# Altium PCB E_Tactile_Display.PcbDoc
Units mm, origin at the board's own origin, x right, y up, seen from the top; angles counter-clockwise.
Board outline 38.64 x 258.08 mm, 2 copper layers (Top Layer, Bottom Layer), stack 0.321 mm thick; 3 components, 32 nets, 64 pads, 16 vias.
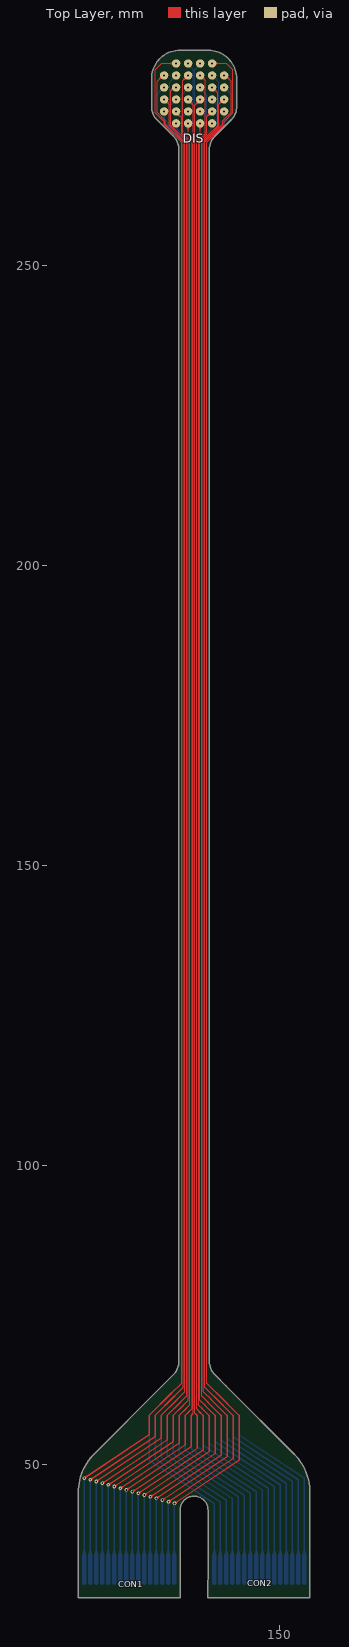
[diagram p0: Top Layer view]
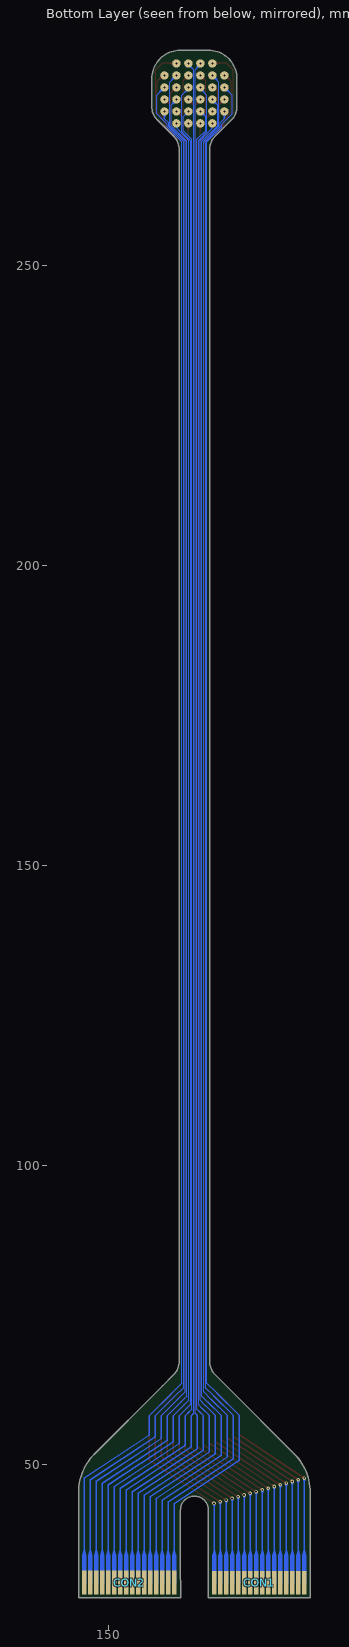
[diagram p1: Bottom Layer view, seen from below]

## Layer stack, top to bottom
Top Stiffener: core 0.1, Core-009, Dk 4.5
Top PI Coverlay: solder mask 0.05, FC-001, Dk 4
Top Layer: signal copper 0.035
Adhesive 1: prepreg 0.013, PP-006, Dk 4.1
Polymide: core 0.025, Core-009, Dk 4.5
Adhesive 2: prepreg 0.013, PP-006, Dk 4.1
Bottom Layer: signal copper 0.035
Bottom PI Coverlay: solder mask 0.05, FC-001, Dk 4
Bottom Stiffener: core 0.1, Core-009, Dk 4.5

## Board outline
116.375,27.85 133.375,27.85 133.375,33.85 133.375,42.486 cw(c135.675,42.486) 135.675,44.786 135.717,44.786 cw(c135.717,42.486) 138.017,42.486 138.017,33.85 137.975,27.85 155.017,27.85 155.017,33.85 155.017,45.386 ccw(c145.838,45.386) 152.328,51.876 141.036,63.169 139.145,65.06 cw(c141.313,67.228) 138.247,67.228 138.247,269.409 cw(c141.313,269.409) 139.145,271.577 141.898,274.33 ccw(c139.73,276.498) 142.796,276.498 142.796,281.194 ccw(c138.062,281.194) 138.062,285.928 133.33,285.928 ccw(c133.33,281.194) 128.596,281.194 128.596,276.498 ccw(c131.662,276.498) 129.494,274.33 132.247,271.577 cw(c130.079,269.409) 133.145,269.409 133.145,67.228 cw(c130.079,67.228) 132.247,65.06 130.356,63.169 119.063,51.876 ccw(c125.554,45.386) 116.375,45.386 116.375,33.85 116.375,29.25
board region "Layer Stack Region 7": 116.375,45.386 116.375,45.837 116.463,46.734 116.639,47.619 116.901,48.482 117.246,49.315 117.671,50.11 118.172,50.86 118.745,51.557 119.063,51.876 130.356,63.169 132.247,65.06 132.351,65.169 132.542,65.401 132.709,65.651 132.851,65.917 132.966,66.195 133.053,66.483 133.112,66.778 133.141,67.077 133.145,67.228 133.145,269.409 133.141,269.559 133.112,269.858 133.053,270.154 132.966,270.441 132.851,270.719 132.709,270.985 132.542,271.235 132.351,271.468 132.247,271.577 129.494,274.33 129.387,274.436 129.196,274.669 129.029,274.919 128.887,275.185 128.772,275.463 128.684,275.752 128.625,276.047 128.596,276.347 128.596,276.498 128.596,281.194 128.596,281.504 128.677,282.119 128.838,282.719 129.075,283.292 129.385,283.829 129.763,284.322 130.202,284.761 130.694,285.138 131.232,285.449 131.805,285.686 132.404,285.847 133.02,285.928 133.33,285.928 138.062,285.928 138.372,285.928 138.988,285.847 139.587,285.686 140.16,285.449 140.698,285.138 141.19,284.761 141.629,284.322 142.007,283.829 142.317,283.292 142.554,282.719 142.715,282.119 142.796,281.504 142.796,281.194 142.796,276.498 142.796,276.347 142.766,276.047 142.708,275.752 142.62,275.464 142.505,275.185 142.363,274.92 142.196,274.669 142.004,274.436 141.898,274.33 139.145,271.577 139.041,271.468 138.85,271.235 138.683,270.985 138.541,270.719 138.426,270.441 138.339,270.154 138.28,269.858 138.25,269.559 138.247,269.409 138.247,67.228 138.25,67.077 138.28,66.778 138.339,66.483 138.426,66.195 138.541,65.917 138.683,65.651 138.85,65.401 139.041,65.169 139.145,65.06 141.036,63.169 152.328,51.876 152.647,51.557 153.219,50.86 153.72,50.11 154.146,49.315 154.491,48.482 154.752,47.619 154.928,46.734 155.017,45.837 155.017,45.386 155.017,33.85 138.017,33.85 138.017,42.486 138.006,42.712 137.918,43.154 137.745,43.57 137.495,43.945 137.176,44.264 136.801,44.515 136.384,44.687 135.942,44.775 135.717,44.786 135.675,44.786 135.45,44.775 135.007,44.687 134.591,44.515 134.216,44.264 133.897,43.945 133.647,43.57 133.474,43.154 133.386,42.712 133.375,42.486 133.375,33.85 116.375,33.85
board region "Layer Stack Region 8": 137.975,27.85 155.017,27.85 155.017,33.85 138.017,33.85
board region "Layer Stack Region 1": 116.375,27.85 133.375,27.85 133.375,33.85 116.375,33.85 116.375,29.25

## Design rules (kind name [scope] priority, off if disabled: settings)
BoardOutlineClearance [All] p1: gap=0.2 ignorepadtopadclearanceinfootprint=FALSE except(0: Track-SplitContinuation)
Clearance [All] p1: gap=0.127 ignorepadtopadclearanceinfootprint=FALSE except(0.1: Arc-Arc Arc-Track Arc-SMDPad Arc-THPad Arc-Via Arc-Fill Arc-Poly Arc-Region Arc-Text Track-Track Track-SMDPad Track-THPad Track-Via Track-Fill Track-Poly Track-Region Track-Text; 0.25: Arc-Hole Track-Hole SMDPad-Hole THPad-Hole Via-Hole Fill-Hole Poly-Hole Region-Hole Text-Hole)
ComponentClearance [All] p1: gap=0.127 collisioncheckmode=3 verticalgap=0.127 showdistances=TRUE
DiffPairsRouting [All] p1: maxlimit=0.254 minlimit=0.127 mostfreqgap=0.127 substack1={EE5E7AEB-4C77-4B40-8D6A-D96C21E7CAA2} toplayer_{ee5e7aeb-4c77-4b40-8d6a-d96c21e7caa2}_minwidth=0.381 toplayer_{ee5e7aeb-4c77-4b40-8d6a-d96c21e7caa2}_maxwidth=0.381 toplayer_{ee5e7aeb-4c77-4b40-8d6a-d96c21e7caa2}_prefwidth=0.381 bottomlayer_{ee5e7aeb-4c77-4b40-8d6a-d96c21e7caa2}_minwidth=0.381 bottomlayer_{ee5e7aeb-4c77-4b40-8d6a-d96c21e7caa2}_maxwidth=0.381 bottomlayer_{ee5e7aeb-4c77-4b40-8d6a-d96c21e7caa2}_prefwidth=0.381 toplayer_minwidth=0.127 toplayer_maxwidth=25.4 toplayer_prefwidth=0.127 bottomlayer_minwidth=0.127 bottomlayer_maxwidth=25.4 bottomlayer_prefwidth=0.127 substack2={FC3574B1-0B62-4439-9CDF-B77EBD2AA575} toplayer_{fc3574b1-0b62-4439-9cdf-b77ebd2aa575}_minwidth=0.381 toplayer_{fc3574b1-0b62-4439-9cdf-b77ebd2aa575}_maxwidth=0.381 toplayer_{fc3574b1-0b62-4439-9cdf-b77ebd2aa575}_prefwidth=0.381 bottomlayer_{fc3574b1-0b62-4439-9cdf-b77ebd2aa575}_minwidth=0.381 bottomlayer_{fc3574b1-0b62-4439-9cdf-b77ebd2aa575}_maxwidth=0.381 bottomlayer_{fc3574b1-0b62-4439-9cdf-b77ebd2aa575}_prefwidth=0.381 substack3={35F34E09-632A-4CE6-B0EC-4E9E578C186C} toplayer_{35f34e09-632a-4ce6-b0ec-4e9e578c186c}_minwidth=0.381 toplayer_{35f34e09-632a-4ce6-b0ec-4e9e578c186c}_maxwidth=0.381 toplayer_{35f34e09-632a-4ce6-b0ec-4e9e578c186c}_prefwidth=0.381 bottomlayer_{35f34e09-632a-4ce6-b0ec-4e9e578c186c}_minwidth=0.381 bottomlayer_{35f34e09-632a-4ce6-b0ec-4e9e578c186c}_maxwidth=0.381 bottomlayer_{35f34e09-632a-4ce6-b0ec-4e9e578c186c}_prefwidth=0.381 maxuncoupledlength=12.7
Height [All] p1: minheight=0 maxheight=1816.048 prefheight=12.7
HoleSize [All] p1: absolutevalues=TRUE maxlimit=6.3 minlimit=0.3 maxpercent=80.000 minpercent=20.000
HoleToHoleClearance [All] p1: gap=0.25 allowstackedmicrovias=FALSE
MinimumAnnularRing [All] p1: minimumring=0.076
MinimumSolderMaskSliver [All] p1: minsoldermaskwidth=0
PlaneClearance [All] p1: clearance=0.127
PlaneConnect PlaneConnectPowerPads [InPadClass('PowerPads')] p1: planeconnectstyle=Direct reliefexpansion=0.508 reliefentries=4 reliefconductorwidth=0.254 reliefairgap=0.254
PlaneConnect [All] p2: pad.planeconnectstyle=Relief pad.reliefexpansion=0.3 pad.reliefentries=4 pad.reliefconductorwidth=0.127 pad.reliefairgap=0.127 via.planeconnectstyle=Direct via.reliefexpansion=0.3 via.reliefentries=4 via.reliefconductorwidth=0.127 via.reliefairgap=0.127
PolygonConnect PolygonConnectPowerPads [All vs (InPadClass('PowerPads'))] p1: connectstyle=Direct reliefconductorwidth=0.254 reliefentries=4 polygonreliefangle="90 Angle" airgapwidth=0.254
PolygonConnect [All] p2: thpad.connectstyle=Relief thpad.reliefconductorwidth=0.127 thpad.reliefentries=4 thpad.polygonreliefangle="90 Angle" thpad.airgapwidth=0.127 smdpad.connectstyle=Relief smdpad.reliefconductorwidth=0.127 smdpad.reliefentries=4 smdpad.polygonreliefangle="90 Angle" smdpad.airgapwidth=0.127 via.connectstyle=Direct via.reliefconductorwidth=0.127 via.reliefentries=4 via.polygonreliefangle="90 Angle" via.airgapwidth=0.127
RoutingVias [All] p1: holewidth=0.3 width=0.6 viastyle="Through Hole" minholewidth=0.3 minwidth=0.6 maxholewidth=0.6 maxwidth=6.6
SilkToSilkClearance [All] p1: silktosilkclearance=0
SilkToSolderMaskClearance [IsPad] p1: minsilkscreentomaskgap=0.127 clearancetoexposedcopper=TRUE
SolderMaskExpansion [All] p1: expansion=0.075 istentingtop=FALSE
Width [All] p1: maxlimit=25.4 minlimit=0.025 preferedwidth=0.127 substack1={EE5E7AEB-4C77-4B40-8D6A-D96C21E7CAA2} toplayer_{ee5e7aeb-4c77-4b40-8d6a-d96c21e7caa2}_minwidth=0.127 bottomlayer_{ee5e7aeb-4c77-4b40-8d6a-d96c21e7caa2}_minwidth=0.127 substack2={FC3574B1-0B62-4439-9CDF-B77EBD2AA575} toplayer_{fc3574b1-0b62-4439-9cdf-b77ebd2aa575}_minwidth=0.127 bottomlayer_{fc3574b1-0b62-4439-9cdf-b77ebd2aa575}_minwidth=0.127 substack3={35F34E09-632A-4CE6-B0EC-4E9E578C186C} toplayer_{35f34e09-632a-4ce6-b0ec-4e9e578c186c}_minwidth=0.127 bottomlayer_{35f34e09-632a-4ce6-b0ec-4e9e578c186c}_minwidth=0.127 minimp=50.000000 maximp=50.000000 favimp=50.000000
20 further rules are at their usual default settings.

## Classes and differential pairs
component class E_Tactile_Display: CON1 CON2

## Components (designator, comment, footprint, x,y, rotation, side; value= is the part's Value field where it differs from the comment)
CON1 "FFC_CON_16" 16_pin_smd_connector_pads 132.375,30.35 r90 top
CON2 "FFC_CON_16" 16_pin_smd_connector_pads 154.066,30.362 r90 top
DIS "Etactile_display" Electrode_Display 135.696,278.728 r0 top

## Footprints (in the part's own frame and the unit in brackets; to place one, negate y for a bottom-side part, rotate by r counter-clockwise, add the part's x,y. Pads: shape width x height; smd on the part's side, far side on the other; paste and mask are expansions set on the pad)
16_pin_smd_connector_pads [mm]
  rect 4x0.7 smd far side mask+0: 1(0,15) 2(0,14) 3(0,13) 4(0,12) 5(0,11) 6(0,10) 7(0,9) 8(0,8) 9(0,7) 10(0,6) 11(0,5) 12(0,4) 13(0,3) 14(0,2) 15(0,1) 16(0,0)
Electrode_Display [mm]
  round 1.4 hole 0.3: 0(-3,5) 1(-5,3) 2(-5,-1) 3(-3,1) 4(-3,-3) 5(-1,3) 6(-1,-5) 7(-1,-1) 8(1,-1) 9(1,-5) 10(1,3) 11(3,-3) 12(3,1) 13(5,-1) 14(5,3) 15(3,5) 16(-5,1) 17(-5,-3) 18(-3,3) 19(-3,-1) 20(-3,-5) 21(-1,1) 22(-1,-3) 23(-1,5) 24(1,5) 25(1,-3) 26(1,1) 27(3,-5) 28(3,-1) 29(3,3) 30(5,-3) 31(5,1)

## Via types
v1: diameter 0.6, hole 0.3, Top Layer to Bottom Layer, tented both sides, 16 vias

## Nets (pads, with @x,y where several pads share a name; then routed paths per layer and width w, separated by ;. In a path a pad name is that pad's centre, name@x,y a point inside that pad or via, vN(x,y) a via of type N, cw(c..) or ccw(c..) an arc to the next point about the centre after c; other vN are vias at no path point)
NetCON1_1: CON1.1 DIS.0 | length 266
  Top Layer w0.127: 131.9,61.957 133.6,63.657 133.6,270.625 130.696,273.529 130.696,274.028 129.253,275.47 129.253,282.685 130.296,283.728 DIS.0
  Top Layer w0.254: v1(117.375,47.807) 128.196,55.007 128.196,58.253 131.9,61.957
  Bottom Layer w0.254: 117.375,34.883 v1(117.375,47.807)
  Bottom Layer w0.7: CON1.1 117.375,34.883
NetCON1_2: CON1.2 DIS.1 | length 261.5
  Top Layer w0.127: DIS.1 130.496,281.728 129.519,280.751 129.519,275.604 130.923,274.201 130.923,273.623 133.88,270.666 133.88,62.937 132.393,61.45
  Top Layer w0.254: v1(118.378,47.525) 129.196,54.725 129.196,58.253 132.393,61.45
  Bottom Layer w0.254: 118.375,34.883 v1@118.375,47.522
  Bottom Layer w0.7: CON1.2 118.375,34.883
NetCON1_3: CON1.3 DIS.2 | length 256.2
  Top Layer w0.127: DIS.2 131.559,276.864 131.559,273.308 134.159,270.708 134.159,62.216 132.868,60.925
  Top Layer w0.254: v1(119.381,47.243) 130.196,54.443 130.196,58.253 132.868,60.925
  Bottom Layer w0.254: 119.375,34.883 v1@119.375,47.237
  Bottom Layer w0.7: CON1.3 119.375,34.883
NetCON1_4: CON1.4 DIS.3 | length 258.2
  Top Layer w0.127: DIS.3 132.396,279.728 131.786,279.118 131.786,273.402 134.438,270.75 134.438,61.495 133.368,60.425
  Top Layer w0.254: v1(120.384,46.961) 131.197,54.16 ; 131.196,54.161 131.196,58.253 133.368,60.425
  Bottom Layer w0.254: 120.375,34.883 v1@120.375,46.952
  Bottom Layer w0.7: CON1.4 120.375,34.883
NetCON1_5: CON1.5 DIS.4 | length 253
  Top Layer w0.127: DIS.4 132.696,275.531 133.596,274.631 133.596,271.913 134.718,270.791 134.718,60.775 133.868,59.925
  Top Layer w0.254: v1(121.387,46.679) 132.083,53.804 132.196,53.917 132.196,58.253 133.868,59.925
  Bottom Layer w0.254: 121.375,34.883 v1@121.375,46.667
  Bottom Layer w0.7: CON1.5 121.375,34.883
NetCON1_6: CON1.6 DIS.5 | length 258.7
  Top Layer w0.127: 134.375,59.432 134.997,60.054 134.997,270.833 133.824,272.006 133.824,280.856 DIS.5
  Top Layer w0.254: v1(122.39,46.397) 133.196,53.597 133.196,58.253 134.375,59.432
  Bottom Layer w0.254: 122.375,34.883 v1@122.375,46.382
  Bottom Layer w0.7: CON1.6 122.375,34.883
NetCON1_7: CON1.7 DIS.6 | length 249.9
  Top Layer w0.127: DIS.6 134.696,271.628 135.277,271.047 135.277,59.334 134.825,58.882
  Top Layer w0.254: v1(123.393,46.115) 134.196,53.315 134.196,58.253 134.825,58.882
  Bottom Layer w0.254: 123.375,34.883 123.375,46.097 v1(123.393,46.115)
  Bottom Layer w0.7: CON1.7 123.375,34.883
NetCON1_8: CON1.8 DIS.7 | length 253.7
  Top Layer w0.127: DIS.7 134.696,277.628 135.559,276.764 135.559,272.121 135.556,272.117 135.556,58.613 135.343,58.4
  Top Layer w0.254: v1(124.396,45.833) 135.196,53.033 135.196,58.253 135.343,58.4
  Bottom Layer w0.254: 124.375,34.883 124.375,45.812 v1(124.396,45.833)
  Bottom Layer w0.7: CON1.8 124.375,34.883
NetCON1_9: CON1.9 DIS.8 | length 253.7
  Top Layer w0.127: 136.048,58.4 135.836,58.613 135.835,272.117 135.832,272.121 135.832,276.764 136.696,277.628 DIS.8
  Top Layer w0.254: v1(125.399,45.551) 136.196,52.751 136.196,58.253 136.048,58.4
  Bottom Layer w0.254: 125.375,34.883 125.375,45.527 v1(125.399,45.551)
  Bottom Layer w0.7: CON1.9 125.375,34.883
NetCON1_10: CON1.10 DIS.9 | length 249.9
  Top Layer w0.127: 136.567,58.882 136.115,59.333 136.115,271.047 136.696,271.628 DIS.9
  Top Layer w0.254: v1(126.402,45.269) 137.196,52.469 137.196,58.253 136.567,58.882
  Bottom Layer w0.254: 126.375,34.883 126.375,45.242 v1(126.402,45.269)
  Bottom Layer w0.7: CON1.10 126.375,34.883
NetCON1_11: CON1.11 DIS.10 | length 258.8
  Top Layer w0.127: DIS.10 137.482,280.942 ; 137.017,59.432 136.396,60.053 136.396,60.153 136.396,270.805 137.568,271.977 137.568,280.856 137.482,280.942
  Top Layer w0.254: v1(127.406,44.987) 138.196,52.187 138.196,58.253 137.017,59.432
  Bottom Layer w0.254: 127.375,34.883 127.375,44.957 v1(127.406,44.987)
  Bottom Layer w0.7: CON1.11 127.375,34.883
NetCON1_12: CON1.12 DIS.11 | length 253
  Top Layer w0.127: 137.523,59.925 136.674,60.775 136.674,270.762 137.796,271.884 137.796,274.828 DIS.11
  Top Layer w0.254: v1(128.409,44.705) 139.196,51.905 139.196,58.253 137.523,59.925
  Bottom Layer w0.254: 128.375,34.883 128.375,44.672 v1(128.409,44.705)
  Bottom Layer w0.7: CON1.12 128.375,34.883
NetCON1_13: CON1.13 DIS.12 | length 258
  Top Layer w0.127: 138.023,60.425 136.953,61.495 136.953,270.721 138.194,271.962 138.194,271.967 139.605,273.378 139.605,278.828 139.596,278.828 DIS.12
  Top Layer w0.254: v1(129.412,44.423) 140.196,51.624 140.196,58.253 138.023,60.425
  Bottom Layer w0.254: 129.375,34.883 129.375,44.387 v1(129.412,44.423)
  Bottom Layer w0.7: CON1.13 129.375,34.883
NetCON1_14: CON1.14 DIS.13 | length 256.3
  Top Layer w0.127: 138.523,60.925 137.233,62.216 137.232,270.679 138.427,271.874 139.832,273.279 139.832,276.946 140.614,277.728 DIS.13
  Top Layer w0.254: v1(130.415,44.142) 141.196,51.342 141.196,58.253 138.523,60.925
  Bottom Layer w0.254: 130.375,34.883 130.375,44.102 v1(130.415,44.142)
  Bottom Layer w0.7: CON1.14 130.375,34.883
NetCON1_15: CON1.15 DIS.14 | length 261.5
  Top Layer w0.127: 138.998,61.45 137.512,62.937 137.512,270.637 138.654,271.78 140.469,273.594 140.469,274.201 141.872,275.604 141.872,280.751 140.896,281.728 DIS.14
  Top Layer w0.254: v1(131.418,43.86) 142.196,51.06 142.196,58.253 138.998,61.45
  Bottom Layer w0.254: 131.375,34.84 131.375,43.817 v1(131.418,43.86)
  Bottom Layer w0.7: CON1.15 131.375,34.84
NetCON1_16: CON1.16 DIS.15 | length 266
  Top Layer w0.127: DIS.15 141.096,283.728 142.138,282.685 142.138,275.47 140.696,274.028 140.696,273.5 138.881,271.686 137.791,270.596 137.791,63.657 139.492,61.957
  Top Layer w0.254: v1(132.421,43.578) 143.196,50.778 143.196,58.253 139.492,61.957
  Bottom Layer w0.254: 132.375,34.883 132.375,43.532 v1(132.421,43.578)
  Bottom Layer w0.7: CON1.16 132.375,34.883
NetCON2_1: CON2.1 DIS.16 | length 259.7
  Bottom Layer w0.127: DIS.16 129.396,278.428 129.396,275.328 131.151,273.572 131.151,273.088 133.6,270.639 133.6,63.632 131.9,61.932
  Bottom Layer w0.254: 131.9,61.932 128.196,58.228 128.196,50.753 139.066,43.544 139.066,34.895
  Bottom Layer w0.7: CON2.1 139.066,34.895
NetCON2_2: CON2.2 DIS.17 | length 254.4
  Bottom Layer w0.127: DIS.17 130.696,274.528 131.378,273.845 131.378,273.182 133.88,270.68 133.88,270.428 ; 132.393,61.425 133.88,62.912 133.88,270.43
  Bottom Layer w0.254: 132.393,61.425 129.196,58.228 129.196,51.035 140.024,43.872 ; 140.066,34.852 140.066,43.829
  Bottom Layer w0.7: CON2.2 140.066,34.852
NetCON2_3: CON2.3 DIS.18 | length 260.4
  Bottom Layer w0.127: DIS.18 131.596,280.628 131.596,274.973 131.605,274.964 131.605,273.276 134.159,270.722 134.159,62.191 132.868,60.9
  Bottom Layer w0.254: 132.868,60.9 130.196,58.228 130.196,51.317 141.066,44.114 141.066,34.895
  Bottom Layer w0.7: CON2.3 141.066,34.895
NetCON2_4: CON2.4 DIS.19 | length 256
  Bottom Layer w0.127: DIS.19 132.696,277.628 131.823,276.755 131.823,275.067 131.832,275.058 131.832,273.37 134.439,270.764 134.439,61.47 133.368,60.4
  Bottom Layer w0.254: 133.368,60.4 131.196,58.228 131.196,51.599 142.066,44.399 142.066,34.895
  Bottom Layer w0.7: CON2.4 142.066,34.895
NetCON2_5: CON2.5 DIS.20 | length 251.1
  Bottom Layer w0.127: DIS.20 132.796,273.628 132.796,272.828 ; 132.796,272.864 132.796,272.828 ; 133.868,59.9 134.718,60.75 134.718,270.906 132.796,272.828
  Bottom Layer w0.254: 133.868,59.9 132.196,58.228 132.196,51.88 143.066,44.684 143.066,34.895
  Bottom Layer w0.7: CON2.5 143.066,34.895
NetCON2_6: CON2.6 DIS.21 | length 257
  Bottom Layer w0.127: 134.375,59.407 134.997,60.029 134.997,270.947 133.596,272.349 133.596,278.428 134.696,279.528 DIS.21
  Bottom Layer w0.254: 134.375,59.407 133.196,58.228 133.196,52.162 144.066,44.969 144.066,34.895
  Bottom Layer w0.7: CON2.6 144.066,34.895
NetCON2_7: CON2.7 DIS.22 | length 252.6
  Bottom Layer w0.127: DIS.22 133.823,274.855 133.823,272.528 135.277,271.074 135.277,59.309 134.825,58.857
  Bottom Layer w0.254: 134.825,58.857 134.196,58.228 134.196,52.444 145.066,45.254 145.066,34.895
  Bottom Layer w0.7: CON2.7 145.066,34.895
NetCON2_8: CON2.8 DIS.23 | length 259.7
  Bottom Layer w0.127: DIS.23 134.696,283.528 135.559,282.664 135.559,273.37 135.556,273.367 135.556,58.588 135.343,58.375
  Bottom Layer w0.254: 135.343,58.375 135.196,58.228 135.196,52.726 146.066,45.539 146.066,34.895
  Bottom Layer w0.7: CON2.8 146.066,34.895
NetCON2_9: CON2.9 DIS.24 | length 259.7
  Bottom Layer w0.127: 136.048,58.375 135.836,58.588 135.836,273.367 135.832,273.37 135.832,282.664 136.696,283.528 DIS.24
  Bottom Layer w0.254: 136.048,58.375 136.196,58.228 136.196,53.008 147.066,45.824 147.066,34.895
  Bottom Layer w0.7: CON2.9 147.066,34.895
NetCON2_10: CON2.10 DIS.25 | length 252.6
  Bottom Layer w0.127: 136.567,58.857 136.115,59.308 136.115,271.074 137.569,272.528 137.569,274.855 137.306,275.117 DIS.25
  Bottom Layer w0.254: 136.567,58.857 137.196,58.228 137.196,53.29 148.066,46.109 148.066,34.895
  Bottom Layer w0.7: CON2.10 148.066,34.895
NetCON2_11: CON2.11 DIS.26 | length 257
  Bottom Layer w0.127: 136.394,60.028 136.394,270.928 136.394,270.947 137.796,272.349 137.796,278.428 136.696,279.528 DIS.26 ; 136.396,60.028 137.017,59.407
  Bottom Layer w0.254: 137.017,59.407 138.196,58.228 138.196,53.572 149.066,46.394 149.066,34.895
  Bottom Layer w0.7: CON2.11 149.066,34.895
NetCON2_12: CON2.12 DIS.27 | length 251.1
  Bottom Layer w0.127: 137.523,59.9 136.674,60.75 136.674,270.906 138.596,272.828 ; 138.596,272.864 138.596,272.828 ; DIS.27 138.596,273.628 138.596,272.828
  Bottom Layer w0.254: 137.523,59.9 139.196,58.228 139.196,53.854 150.066,46.679 150.066,34.895
  Bottom Layer w0.7: CON2.12 150.066,34.895
NetCON2_13: CON2.13 DIS.28 | length 256
  Bottom Layer w0.127: 138.023,60.4 136.953,61.47 136.953,270.764 139.559,273.37 139.559,275.058 139.569,275.067 139.569,276.755 138.696,277.628 DIS.28
  Bottom Layer w0.254: 138.023,60.4 140.196,58.228 140.196,54.136 151.066,46.964 151.066,34.895
  Bottom Layer w0.7: CON2.13 151.066,34.895
NetCON2_14: CON2.14 DIS.29 | length 260.4
  Bottom Layer w0.127: 138.523,60.9 137.233,62.191 137.233,270.722 139.786,273.276 139.786,274.964 139.796,274.973 139.796,280.628 DIS.29
  Bottom Layer w0.254: 138.523,60.9 141.196,58.228 141.196,54.418 152.066,47.249 152.066,34.895
  Bottom Layer w0.7: CON2.14 152.066,34.895
NetCON2_15: CON2.15 DIS.30 | length 254.5
  Bottom Layer w0.127: 137.512,270.428 137.512,270.68 140.013,273.182 140.013,273.845 140.696,274.528 DIS.30 ; 137.512,270.43 137.512,62.912 138.998,61.425
  Bottom Layer w0.254: 138.998,61.425 142.196,58.228 142.196,54.7 153.066,47.534 153.066,34.895
  Bottom Layer w0.7: CON2.15 153.066,34.895
NetCON2_16: CON2.16 DIS.31 | length 259.7
  Bottom Layer w0.127: 139.492,61.932 137.791,63.632 137.791,270.639 140.24,273.088 140.24,273.572 141.996,275.328 141.996,278.428 DIS.31
  Bottom Layer w0.254: 139.492,61.932 143.196,58.228 143.196,54.982 154.066,47.819 154.066,34.895
  Bottom Layer w0.7: CON2.16 154.066,34.895

## Polygon pours and split planes (outlines as drawn)
no net on Layer0 "Default Coverlay 2 Top" (split plane): 116.375,45.386 116.375,45.837 116.463,46.734 116.639,47.619 116.901,48.482 117.246,49.315 117.671,50.11 118.172,50.86 118.745,51.557 119.063,51.876 130.356,63.169 132.247,65.06 132.351,65.169 132.542,65.401 132.709,65.651 132.851,65.917 132.966,66.195 133.053,66.483 133.112,66.778 133.141,67.077 133.145,67.228 133.145,269.409 133.141,269.559 133.112,269.858 133.053,270.154 132.966,270.441 132.851,270.719 132.709,270.985 132.542,271.235 132.351,271.468 132.247,271.577 129.494,274.33 129.387,274.436 129.196,274.669 129.029,274.919 128.887,275.185 128.772,275.463 128.684,275.752 128.625,276.047 128.596,276.347 128.596,276.498 128.596,281.194 128.596,281.504 128.677,282.119 128.838,282.719 129.075,283.292 129.385,283.829 129.763,284.322 130.202,284.761 130.694,285.138 131.232,285.449 131.805,285.686 132.404,285.847 133.02,285.928 133.33,285.928 138.062,285.928 138.372,285.928 138.988,285.847 139.587,285.686 140.16,285.449 140.698,285.138 141.19,284.761 141.629,284.322 142.007,283.829 142.317,283.292 142.554,282.719 142.715,282.119 142.796,281.504 142.796,281.194 142.796,276.498 142.796,276.347 142.766,276.047 142.708,275.752 142.62,275.464 142.505,275.185 142.363,274.92 142.196,274.669 142.004,274.436 141.898,274.33 139.145,271.577 139.041,271.468 138.85,271.235 138.683,270.985 138.541,270.719 138.426,270.441 138.339,270.154 138.28,269.858 138.25,269.559 138.247,269.409 138.247,67.228 138.25,67.077 138.28,66.778 138.339,66.483 138.426,66.195 138.541,65.917 138.683,65.651 138.85,65.401 139.041,65.169 139.145,65.06 141.036,63.169 152.328,51.876 152.647,51.557 153.219,50.86 153.72,50.11 154.146,49.315 154.491,48.482 154.752,47.619 154.928,46.734 155.017,45.837 155.017,45.386 155.017,33.85 138.017,33.85 138.017,42.486 138.006,42.712 137.918,43.154 137.745,43.57 137.495,43.945 137.176,44.264 136.801,44.515 136.384,44.687 135.942,44.775 135.717,44.786 135.675,44.786 135.45,44.775 135.007,44.687 134.591,44.515 134.216,44.264 133.897,43.945 133.647,43.57 133.474,43.154 133.386,42.712 133.375,42.486 133.375,33.85 116.375,33.85
no net on Layer0 "Default Coverlay 2 Bottom" (split plane): 116.375,45.386 116.375,45.837 116.463,46.734 116.639,47.619 116.901,48.482 117.246,49.315 117.671,50.11 118.172,50.86 118.745,51.557 119.063,51.876 130.356,63.169 132.247,65.06 132.351,65.169 132.542,65.401 132.709,65.651 132.851,65.917 132.966,66.195 133.053,66.483 133.112,66.778 133.141,67.077 133.145,67.228 133.145,269.409 133.141,269.559 133.112,269.858 133.053,270.154 132.966,270.441 132.851,270.719 132.709,270.985 132.542,271.235 132.351,271.468 132.247,271.577 129.494,274.33 129.387,274.436 129.196,274.669 129.029,274.919 128.887,275.185 128.772,275.463 128.684,275.752 128.625,276.047 128.596,276.347 128.596,276.498 128.596,281.194 128.596,281.504 128.677,282.119 128.838,282.719 129.075,283.292 129.385,283.829 129.763,284.322 130.202,284.761 130.694,285.138 131.232,285.449 131.805,285.686 132.404,285.847 133.02,285.928 133.33,285.928 138.062,285.928 138.372,285.928 138.988,285.847 139.587,285.686 140.16,285.449 140.698,285.138 141.19,284.761 141.629,284.322 142.007,283.829 142.317,283.292 142.554,282.719 142.715,282.119 142.796,281.504 142.796,281.194 142.796,276.498 142.796,276.347 142.766,276.047 142.708,275.752 142.62,275.464 142.505,275.185 142.363,274.92 142.196,274.669 142.004,274.436 141.898,274.33 139.145,271.577 139.041,271.468 138.85,271.235 138.683,270.985 138.541,270.719 138.426,270.441 138.339,270.154 138.28,269.858 138.25,269.559 138.247,269.409 138.247,67.228 138.25,67.077 138.28,66.778 138.339,66.483 138.426,66.195 138.541,65.917 138.683,65.651 138.85,65.401 139.041,65.169 139.145,65.06 141.036,63.169 152.328,51.876 152.647,51.557 153.219,50.86 153.72,50.11 154.146,49.315 154.491,48.482 154.752,47.619 154.928,46.734 155.017,45.837 155.017,45.386 155.017,33.85 138.017,33.85 138.017,42.486 138.006,42.712 137.918,43.154 137.745,43.57 137.495,43.945 137.176,44.264 136.801,44.515 136.384,44.687 135.942,44.775 135.717,44.786 135.675,44.786 135.45,44.775 135.007,44.687 134.591,44.515 134.216,44.264 133.897,43.945 133.647,43.57 133.474,43.154 133.386,42.712 133.375,42.486 133.375,33.85 116.375,33.85

## Silkscreen, mask and mechanical layers (free items; w line width, h text height)
Board Shape:
  lines w0.1: 116.375,33.85 116.375,27.85 133.375,27.85 133.375,33.85 ; 116.375,33.85 116.375,45.386 ; 116.375,33.85 116.375,45.386 ; 116.375,45.386 cw(c125.554,45.386) 119.063,51.876 ; 116.375,45.386 cw(c125.554,45.386) 119.063,51.876 ; 119.063,51.876 130.356,63.169 ; 119.063,51.876 130.356,63.169 ; 128.596,276.498 ccw(c131.662,276.498) 129.494,274.33 ; 128.596,276.498 ccw(c131.662,276.498) 129.494,274.33 ; 128.596,276.498 128.596,281.194 ; 128.596,276.498 128.596,281.194 ; 128.596,281.194 cw(c133.33,281.194) 133.33,285.928 ccw(c133.33,281.194) 128.596,281.194 ; 129.494,274.33 132.247,271.577 ; 129.494,274.33 132.247,271.577 ; 130.356,63.169 132.247,65.06 ; 130.356,63.169 132.247,65.06 ; 132.247,65.06 ccw(c130.079,67.228) 133.145,67.228 ; 132.247,65.06 ccw(c130.079,67.228) 133.145,67.228 ; 132.247,271.577 cw(c130.079,269.409) 133.145,269.409 ; 132.247,271.577 cw(c130.079,269.409) 133.145,269.409 ; 133.145,67.228 133.145,267.228 ; 133.145,67.228 133.145,267.228 ; 133.145,267.228 133.145,269.409 ; 133.145,267.228 133.145,269.409 ; 133.375,33.85 133.375,42.486 ; 133.375,33.85 133.375,42.486 ; 133.375,42.486 cw(c135.675,42.486) 135.675,44.786 ccw(c135.675,42.486) 133.375,42.486 ; 138.017,33.85 137.975,27.85 155.017,27.85 155.017,33.85 ; 138.017,33.85 138.017,42.486 ; 138.017,33.85 138.017,42.486 ; 138.017,42.486 ccw(c135.717,42.486) 135.717,44.786 cw(c135.717,42.486) 138.017,42.486 ; 138.247,67.228 ccw(c141.313,67.228) 139.145,65.06 ; 138.247,67.228 ccw(c141.313,67.228) 139.145,65.06 ; 138.247,67.228 138.247,267.228 ; 138.247,67.228 138.247,267.228 ; 138.247,267.228 138.247,269.409 ; 138.247,267.228 138.247,269.409 ; 138.247,269.409 cw(c141.313,269.409) 139.145,271.577 ; 138.247,269.409 cw(c141.313,269.409) 139.145,271.577 ; 139.145,65.06 141.035,63.169 ; 139.145,65.06 141.035,63.169 ; 139.145,271.577 141.898,274.33 ; 139.145,271.577 141.898,274.33 ; 141.035,63.169 152.328,51.876 ; 141.035,63.169 152.328,51.876 ; 141.898,274.33 ccw(c139.73,276.498) 142.796,276.498 cw(c139.73,276.498) 141.898,274.33 ; 152.328,51.876 cw(c145.838,45.386) 155.017,45.386 ; 152.328,51.876 cw(c145.838,45.386) 155.017,45.386 ; 155.017,33.85 155.017,45.386 ; 155.017,33.85 155.017,45.386 ; 133.145,70.778 133.147,70.78 133.145,70.778 ; 133.33,285.928 138.062,285.928 133.33,285.928 ; 138.062,285.928 cw(c138.062,281.194) 142.796,281.194 ccw(c138.062,281.194) 138.062,285.928 ; 142.796,276.498 142.796,281.194 142.796,276.498
Top Stiffener:
  rectangle: 116.375,27.85 133.375,33.85
  rectangle: 138.017,27.85 155.017,33.85